# Altium PCB PCB2.PcbDoc
Units mil, origin at the board's own origin, x right, y up, seen from the top; angles counter-clockwise.
Board outline 3530 x 3213.31 mil, 4 copper layers (Top Layer, Layer 1, Layer 2, Bottom Layer), stack 62.192 mil thick; 41 components, 21 nets, 168 pads, 535 vias.
Unrouted connection lines stored in the file: 24.
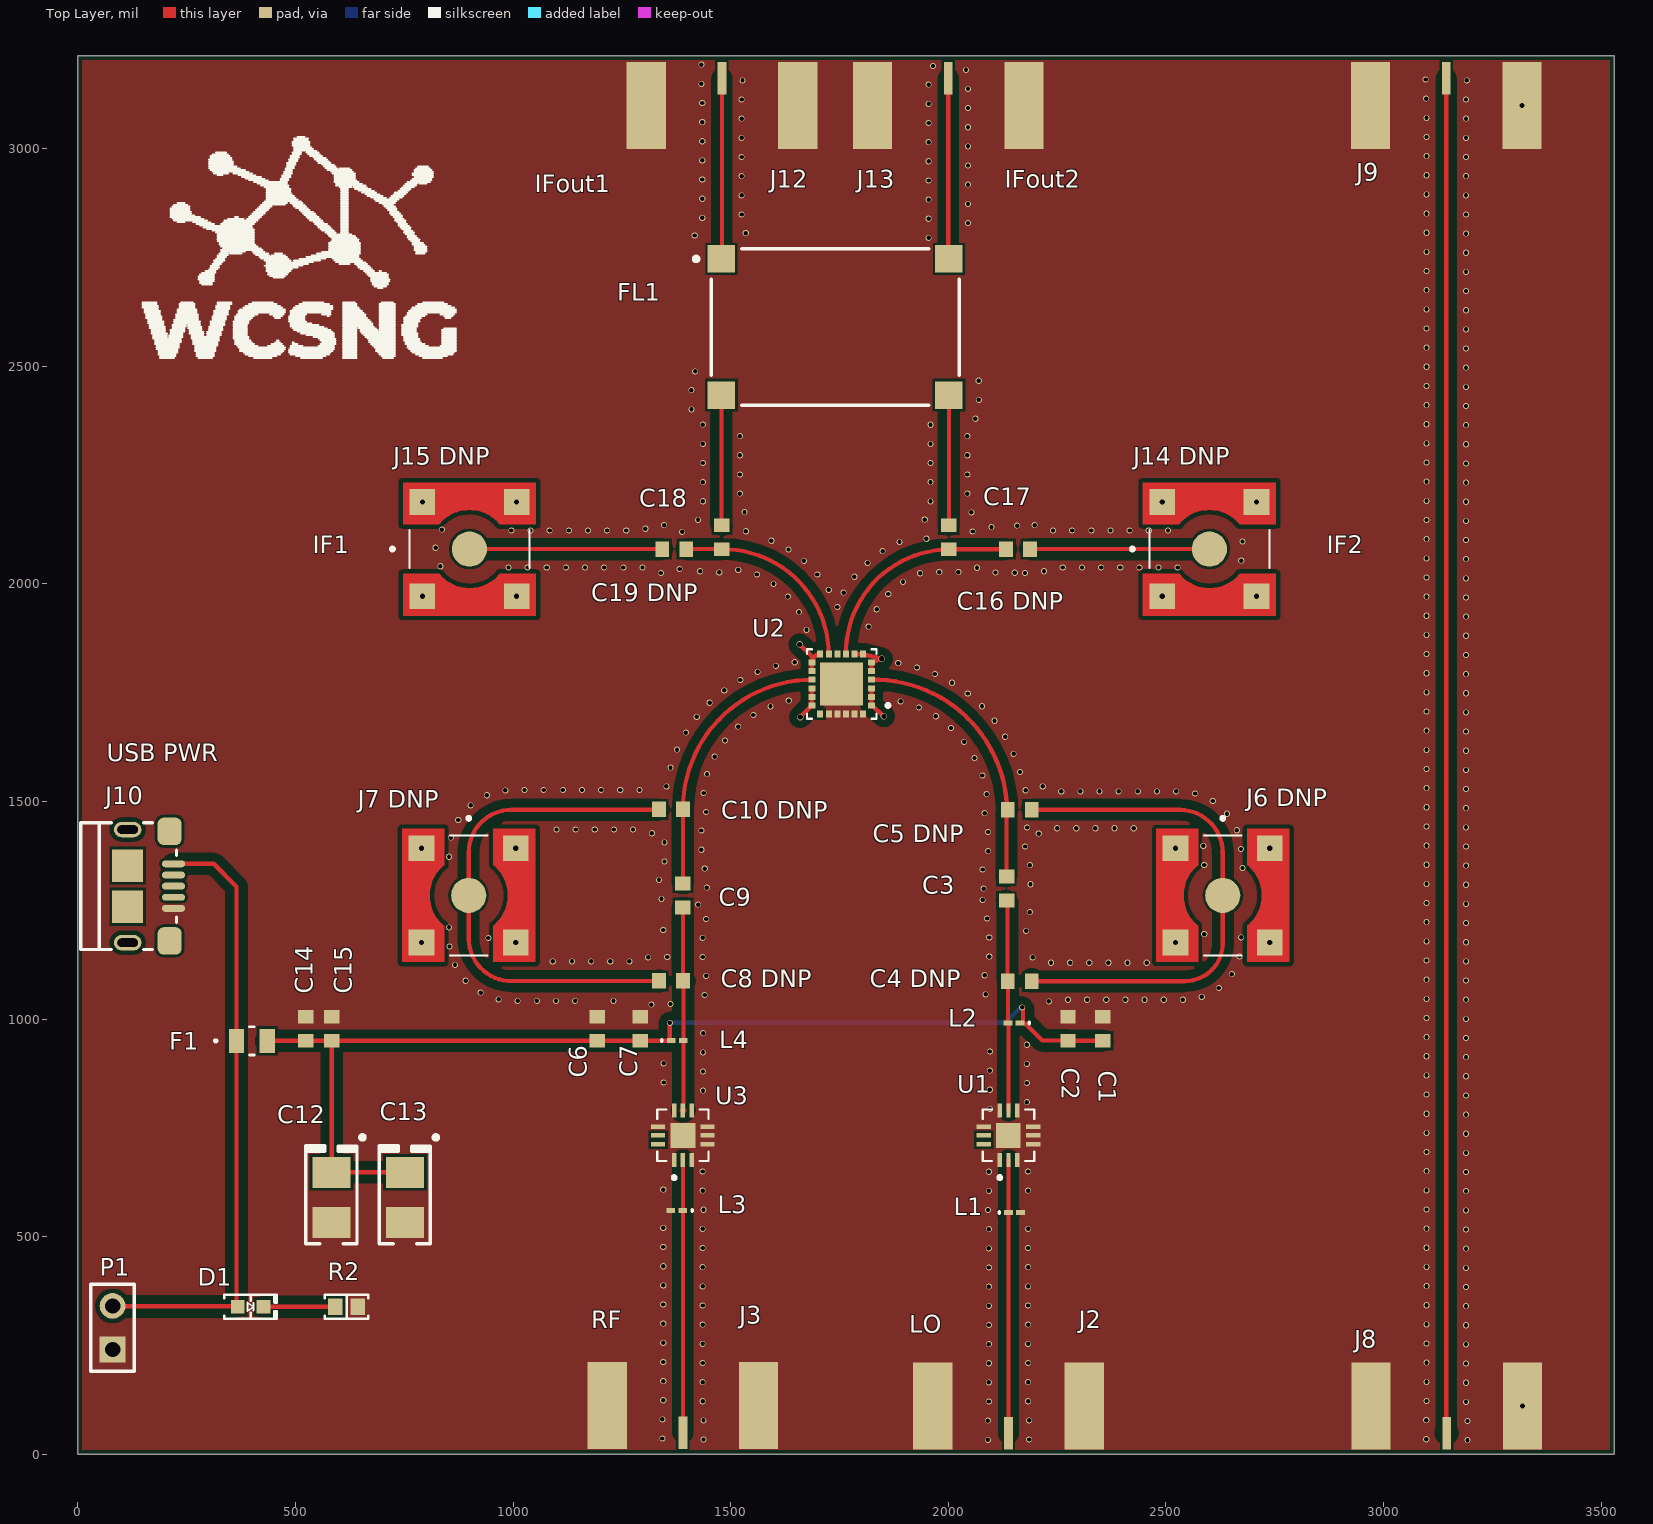
[diagram p0: Top Layer view]
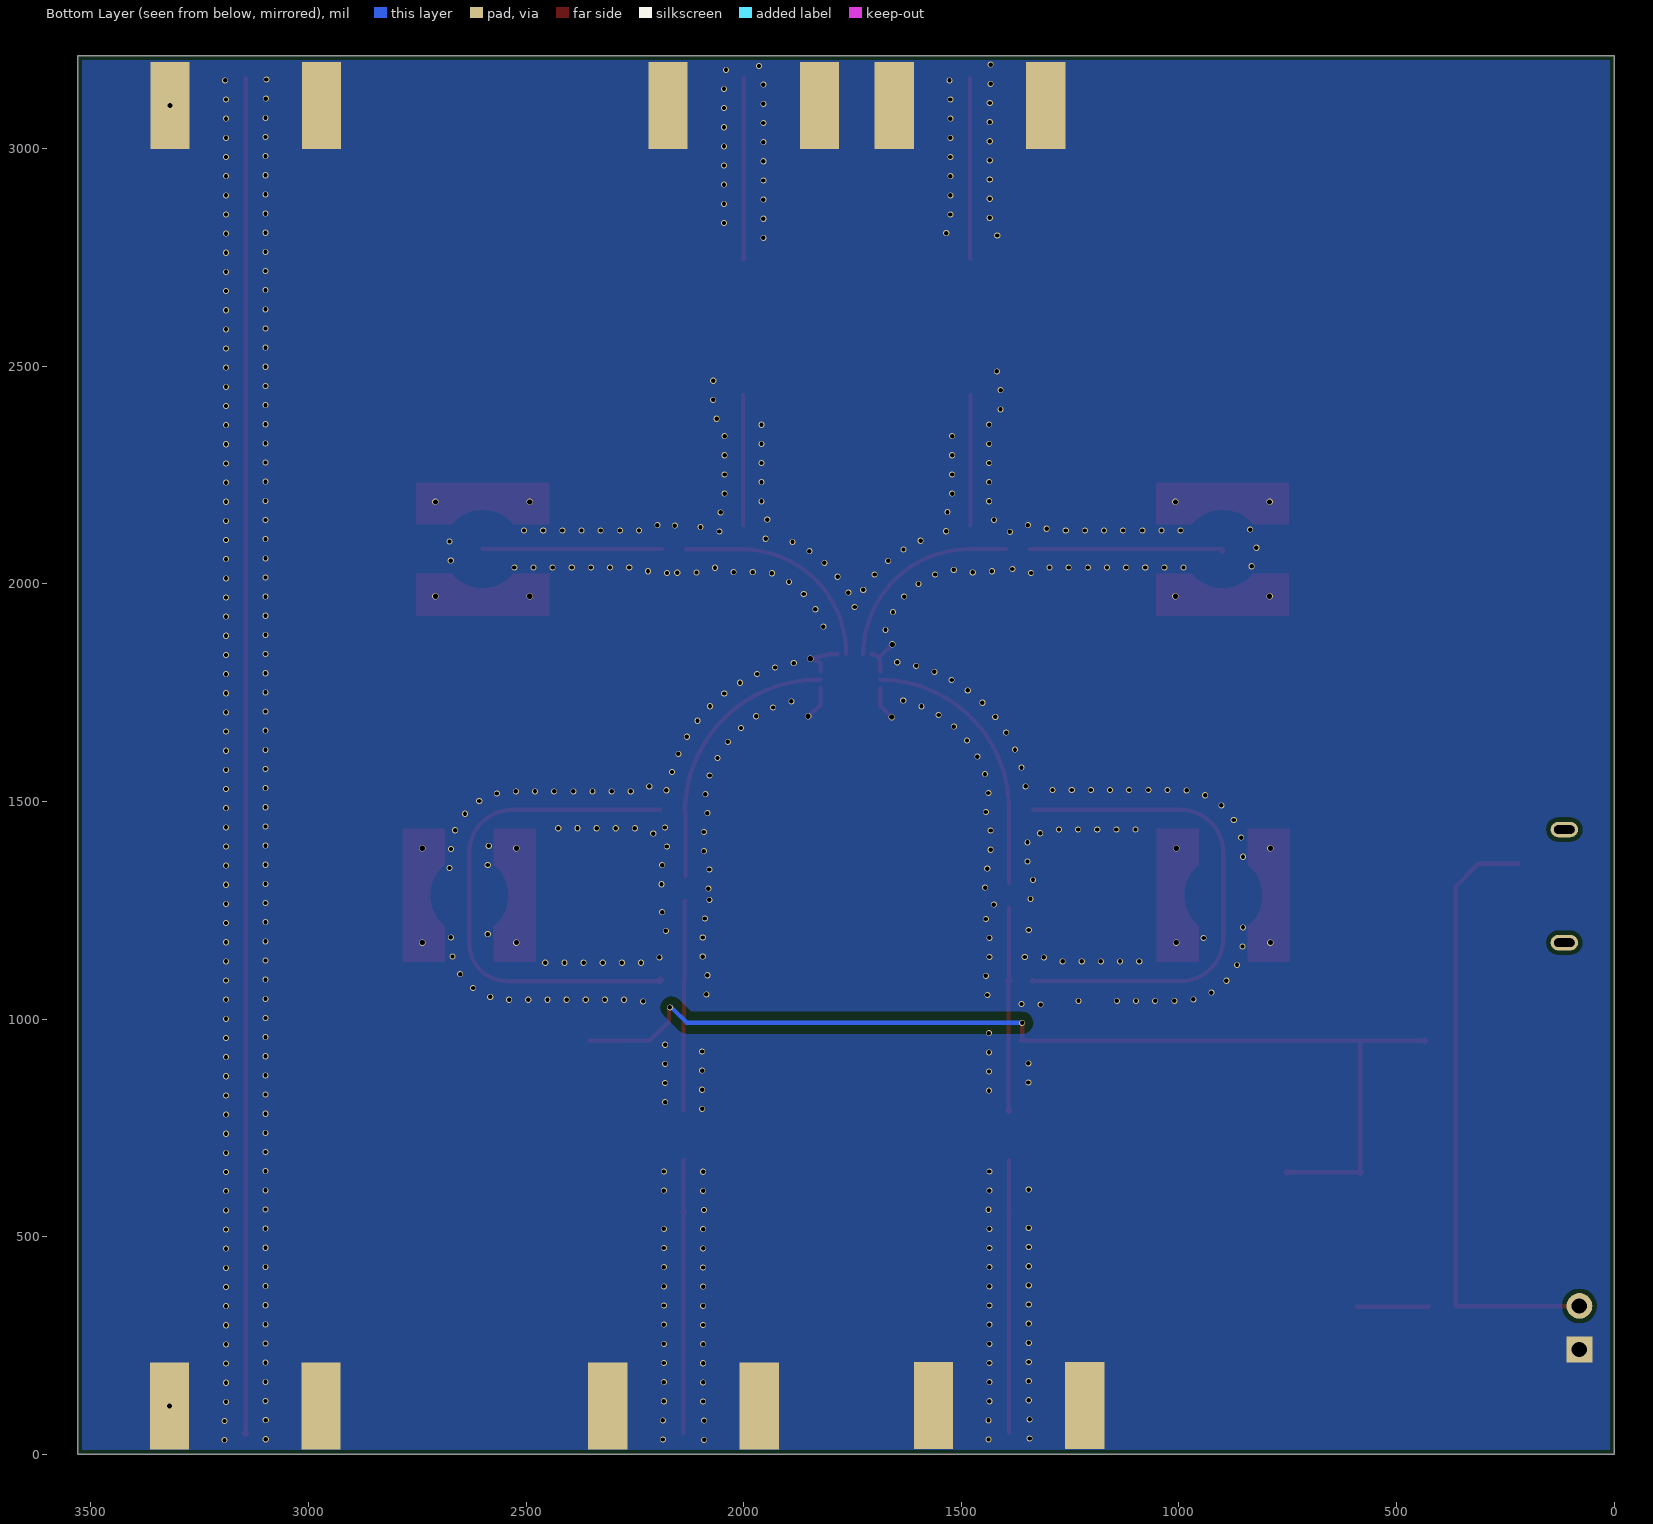
[diagram p1: Bottom Layer view, seen from below]
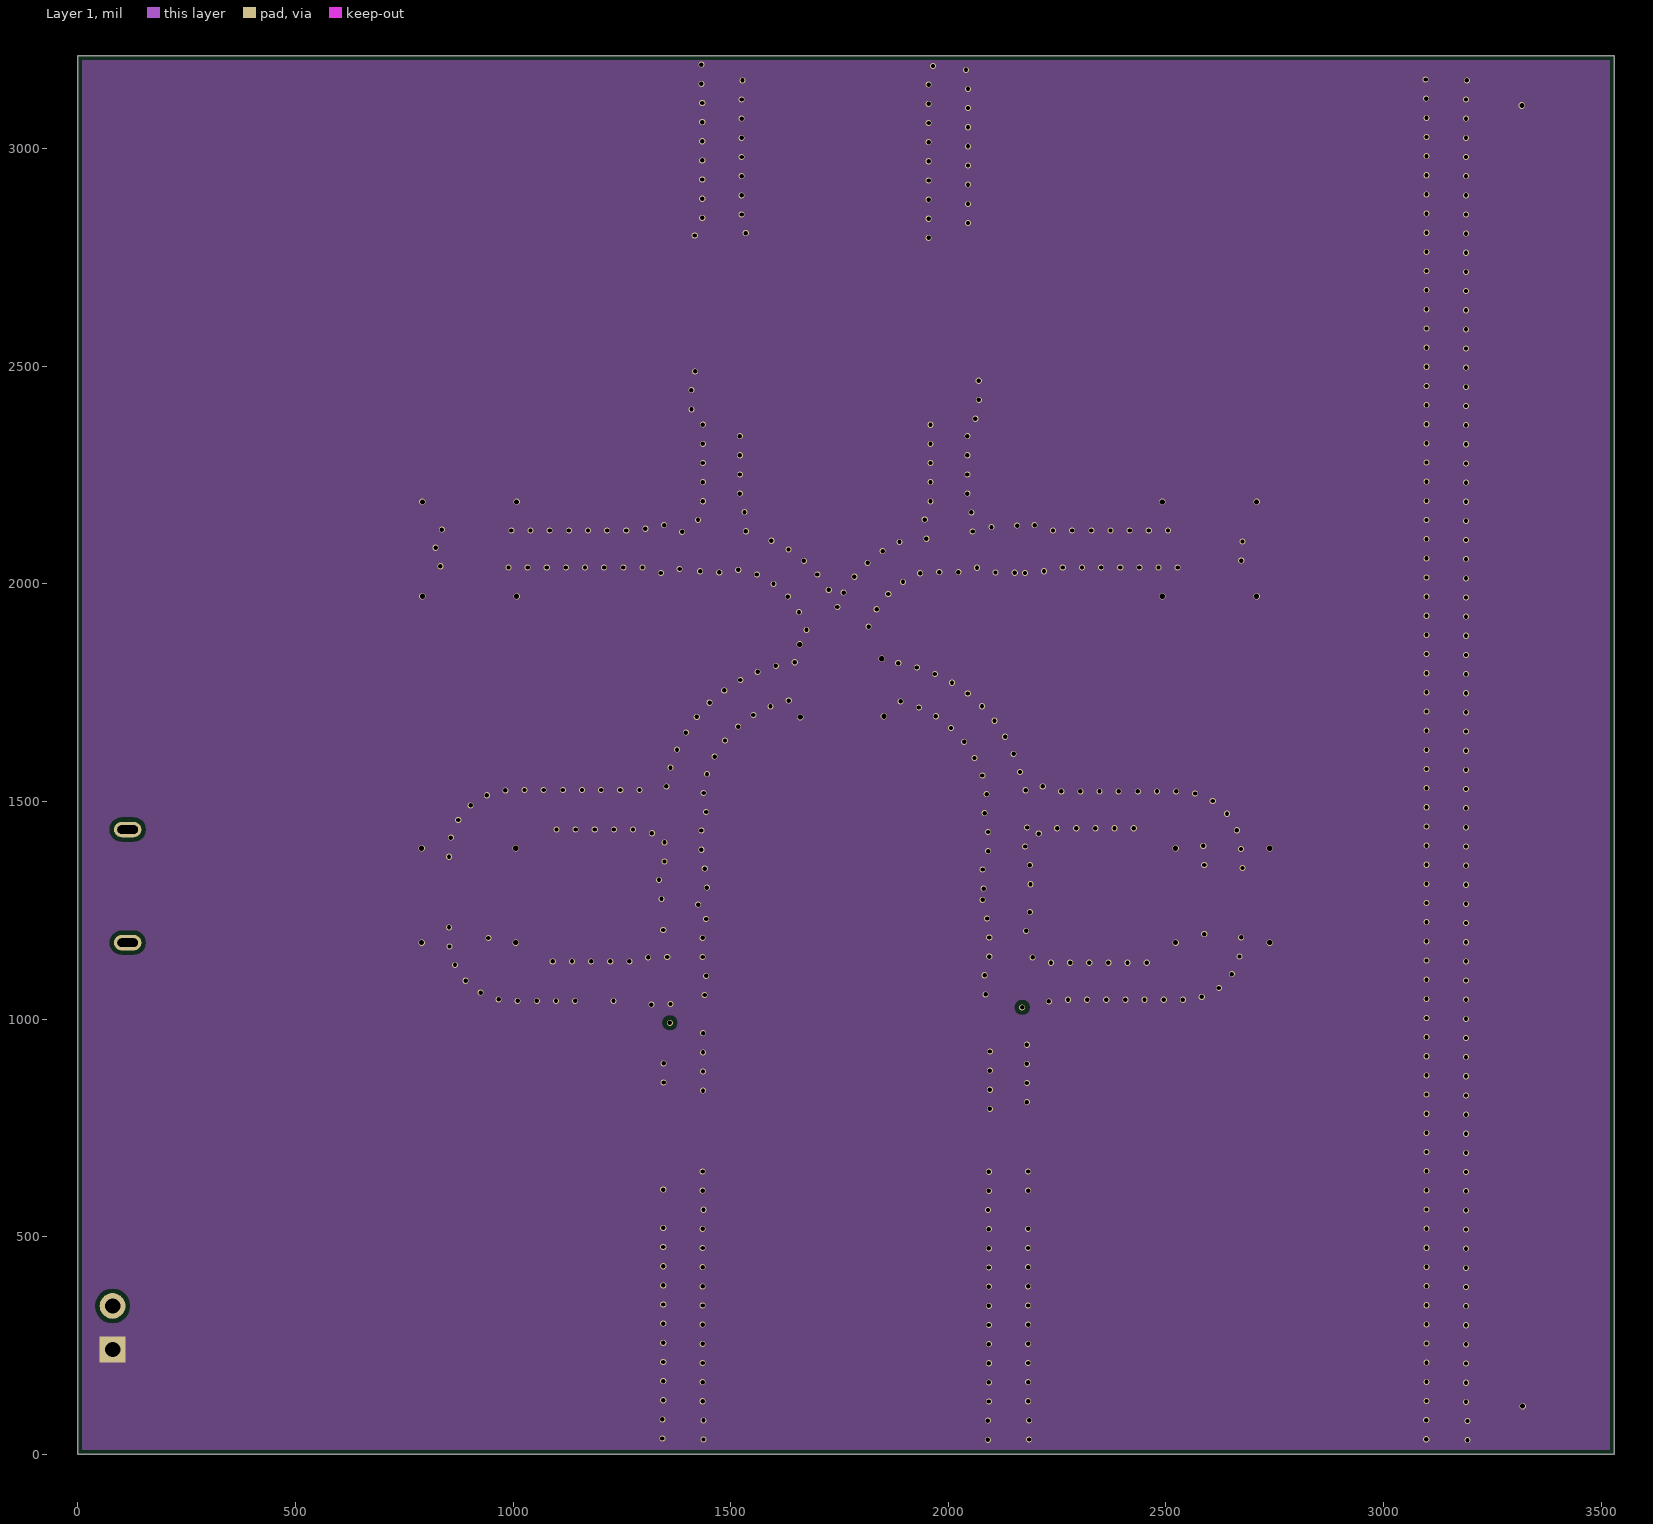
[diagram p2: Layer 1]

## Layer stack, top to bottom
Top Solder: solder mask 0.4, Solder Resist, Dk 3.5
Top Layer: signal copper 1.378
Prepreg-1: prepreg 4, RO4450F, Dk 3.52
Layer 1: signal copper 1.378
FR4 Core: core 48.68, FR4, Dk 4.2
Layer 2: signal copper 1.378
Prepreg-2: prepreg 4, RO4450F, Dk 3.52
Bottom Layer: signal copper 1.378
Bottom Solder: solder mask 0.4, Solder Resist, Dk 3.5

## Board outline
0,3213.31 0,0 3530,0 3530,3213.31

## Design rules (kind name [scope] priority, off if disabled: settings)
BoardOutlineClearance [All] p1: gap=10 ignorepadtopadclearanceinfootprint=FALSE except(0: Arc-SplitContinuation Track-SplitContinuation SMDPad-SplitContinuation THPad-SplitContinuation Via-SplitContinuation Fill-SplitContinuation Poly-SplitContinuation Region-SplitContinuation Text-SplitContinuation)
Clearance [All] p1: gap=10 ignorepadtopadclearanceinfootprint=TRUE except(4: Arc-Arc Arc-Track Track-Track SMDPad-SMDPad; 6: Arc-SMDPad Arc-Via Track-SMDPad Track-Via SMDPad-Via SMDPad-Fill SMDPad-Poly SMDPad-Region; 13: Arc-Hole Track-Hole; 20: Arc-Fill Arc-Poly Arc-Region Track-Fill Track-Poly Track-Region)
MinimumSolderMaskSliver [All] p1: minsoldermaskwidth=1
PolygonConnect [All] p1: connectstyle=Direct reliefconductorwidth=10 reliefentries=4 polygonreliefangle="90 Angle" airgapwidth=10
RoutingVias [All] p1: holewidth=10 width=14 viastyle="Through Hole" minholewidth=10 minwidth=14 maxholewidth=16 maxwidth=20
SilkToSolderMaskClearance [IsPad] p1: minsilkscreentomaskgap=6 clearancetoexposedcopper=TRUE
SolderMaskExpansion [All] p1: expansion=4 istentingtop=FALSE
Width "Schematic Width Constraint_3" [InNet('GND')] p1: maxlimit=10 minlimit=10 preferedwidth=10
Width "Schematic Width Constraint_1" [InNet('NetD1_1')] p2: maxlimit=10 minlimit=10 preferedwidth=10
Width "Schematic Width Constraint" [InNet('NetD1_2')] p3: maxlimit=10 minlimit=10 preferedwidth=10
Width [All] p4: maxlimit=20 minlimit=6 preferedwidth=9.46
28 further rules are at their usual default settings.

## Classes and differential pairs
component class Sheet2: C1 C2 C3 "C4 DNP" "C5 DNP" C6 C7 "C8 DNP" C9 "C10 DNP" C12 C13 C14 C15 "C16 DNP" C18 D1 F1 FL1 J2 J3 "J6 DNP" "J7 DNP" J8 J9 J10 J12 J13 "J14 DNP" L1 L2 L3 L4 P1 R2 U1 U2 U3

## Components (designator, comment, footprint, x,y, rotation, side; value= is the part's Value field where it differs from the comment)
C1 "Cap Semi" 1608[0603] 2354.88,978 r90 top value=10nF
C2 "Cap Semi" 1608[0603] 2275,978 r90 top value=10pF
C3 "Cap Semi" 1608[0603] 2134,1300 r90 top value=100pF
"C4 DNP" "Cap Semi" 1608[0603] 2164,1087 r180 top value=100pF
"C5 DNP" "Cap Semi" 1608[0603] 2164,1481 r180 top value=100pF
C6 "Cap Semi" 1608[0603] 1193.46,978 r90 top value=10nF
C7 "Cap Semi" 1608[0603] 1291.89,978 r90 top value=10pF
"C8 DNP" "Cap Semi" 1608[0603] 1363,1088 r0 top value=100pF
C9 "Cap Semi" 1608[0603] 1390.32,1284.17 r90 top value=100pF
"C10 DNP" "Cap Semi" 1608[0603] 1363,1482 r0 top value=100pF
C12 "10µF" "CAP POL 1411_3528" 583.23,590.52 r270 top
C13 "10µF" "CAP POL 1411_3528" 752,590.52 r270 top
C14 "Cap Semi" 1608[0603] 524,978 r90 top value=1uF
C15 "Cap Semi" 1608[0603] 583.23,978 r90 top value=100nF
"C16 DNP" "Cap Semi" 1608[0603] 2160.31,2080 r0 top value=100pF
C17 "Cap Semi" 1608[0603] 2001,2107 r270 top value=100pF
C18 "Cap Semi" 1608[0603] 1480,2107 r270 top value=100pF
"C19 DNP" "Cap Semi" 1608[0603] 1370.31,2080 r0 top value=100pF
D1 "Blue" "LED 0603_1608 BLUE" 397,339 r0 top
F1 "Part Number: MFU0805FF01000P100" FUS_VISHAY_MFU08 400,950 r0 top value=Value
FL1 "11305-3S" Anaren_11305-3S_MFG 1740,2590 r0 top
J2 "SMA 50 Ohm edge" "SMA-OSHPARK-4L-1.6MM- ALT3" 2138.35,10 r90 top
J3 "SMA 50 Ohm edge" "SMA-OSHPARK-4L-1.6MM- ALT3" 1390.31,11.5 r90 top
"J6 DNP" "CONSMA001-SMD-G" *LINX_CONSMA001-SMD-G_CONSMA001-SMD-G(Primary) 2630.47,1284.17 r0 top
"J7 DNP" "CONSMA001-SMD-G" *LINX_CONSMA001-SMD-G_CONSMA001-SMD-G(Primary) 898.19,1284.17 r0 top
J8 "SMA 50 Ohm edge" "SMA-OSHPARK-4L-1.6MM- ALT3" 3145.45,10 r90 top
J9 "SMA 50 Ohm edge" "SMA-OSHPARK-4L-1.6MM- ALT3" 3144,3200 r270 top
J10 "10118193-0001LF" "FCI USB 10118193-0001LF" 116.65,1305.59 r90 top
J12 "SMA 50 Ohm edge" "SMA-OSHPARK-4L-1.6MM- ALT3" 1480,3200 r270 top
J13 "SMA 50 Ohm edge" "SMA-OSHPARK-4L-1.6MM- ALT3" 2000,3200 r270 top
"J14 DNP" "CONSMA001-SMD-G" *LINX_CONSMA001-SMD-G_CONSMA001-SMD-G(Primary) 2600,2080 r90 top
"J15 DNP" "CONSMA001-SMD-G" *LINX_CONSMA001-SMD-G_CONSMA001-SMD-G(Primary) 900,2080 r90 top
L1 "Inductor" 0603 2152.13,555.83 r0 top value=18nH
L2 "Inductor" 0603 2151,991 r180 top value=39nH
L3 "Inductor" 0603 1376.53,560 r180 top value=18nH
L4 "Inductor" 0603 1377,951 r0 top value=39nH
P1 "Header 2" HDR1X2 80,241 r90 top
R2 "1 kOhms" "RES 0603_1608" 617.59,339 r180 top
U1 "PMA3-83LN+" *QFN51P300X300X89-13N#1 2138.35,732.99 r90 top
U2 "HMC8193LC4" *PQFN50P390X390X100-25N 1755,1770 r180 top
U3 "PMA3-83LN+" *QFN51P300X300X89-13N#2 1390.31,732.99 r90 top

## Footprints (in the part's own frame and the unit in brackets; to place one, negate y for a bottom-side part, rotate by r counter-clockwise, add the part's x,y. Pads: shape width x height; smd on the part's side, far side on the other; paste and mask are expansions set on the pad)
0603 [mm] "Chip Inductor, Body 0.6x0.3mm, IPC High Density"
  rect 0.5x0.3 smd: 1(-0.35,0) 2(0.35,0)
  silkscreen extent -0.9,-0.05 -0.9,0.05, body extent -0.33,-0.18 0.33,0.18, height 0.55
1608[0603] [mm] "Chip Capacitor, Body 1.6x0.8mm, IPC High Density"
  rect 0.8x0.9 smd: 1(-0.7,0) 2(0.7,0)
  body extent -0.87,-0.48 0.87,0.48, height 1.3
*LINX_CONSMA001-SMD-G_CONSMA001-SMD-G(Primary) [mm]
  round 2.05 smd: C(0,0)
  rect 1.5x1.5 smd: G1(-2.75,2.75) G2(-2.75,-2.75) G3(2.75,-2.75) G4(2.75,2.75)
  Top Layer region: 1.44,-3.88 1.44,-1.76 1.54,-1.68 1.618,-1.605 1.705,-1.512 1.787,-1.415 1.864,-1.312 1.934,-1.206 1.999,-1.096 2.057,-0.983 2.109,-0.866 2.154,-0.747 2.193,-0.625 2.225,-0.501 2.249,-0.376 2.267,-0.25 2.278,-0.123 2.281,0.005 2.278,0.133 2.267,0.26 2.249,0.386 2.225,0.511 2.193,0.635 2.154,0.757 2.109,0.876 2.057,0.993 1.999,1.106 1.934,1.216 1.864,1.322 1.787,1.425 1.705,1.522 1.618,1.615 1.54,1.69 1.44,1.76 1.44,3.88 3.88,3.88 3.88,-3.88 1.44,-3.88
  Top Layer region: -1.44,3.88 -1.44,1.76 -1.54,1.68 -1.644,1.579 -1.728,1.486 -1.807,1.389 -1.88,1.288 -1.948,1.183 -2.01,1.075 -2.066,0.963 -2.116,0.849 -2.159,0.732 -2.197,0.612 -2.227,0.491 -2.251,0.368 -2.268,0.244 -2.278,0.12 -2.281,-0.005 -2.278,-0.13 -2.268,-0.254 -2.251,-0.378 -2.227,-0.501 -2.197,-0.622 -2.159,-0.742 -2.116,-0.859 -2.066,-0.973 -2.01,-1.085 -1.948,-1.193 -1.88,-1.298 -1.807,-1.399 -1.728,-1.496 -1.644,-1.589 -1.54,-1.69 -1.44,-1.76 -1.44,-3.88 -3.88,-3.88 -3.88,3.88 -1.44,3.88
  silkscreen extent -1.1,-3.5 1.1,4.6
*PQFN50P390X390X100-25N [mm]
  rect 0.41x0.35 smd: 1(-1.74,1.25) 2(-1.74,0.75) 3(-1.74,0.25) 4(-1.74,-0.25) 5(-1.74,-0.75) 6(-1.74,-1.25) 13(1.74,-1.25) 14(1.74,-0.75) 15(1.74,-0.25) 16(1.74,0.25) 17(1.74,0.75) 18(1.74,1.25)
  rect 0.35x0.41 smd: 7(-1.25,-1.74) 8(-0.75,-1.74) 9(-0.25,-1.74) 10(0.25,-1.74) 11(0.75,-1.74) 12(1.25,-1.74) 19(1.25,1.74) 20(0.75,1.74) 21(0.25,1.74) 22(-0.25,1.74) 23(-0.75,1.74) 24(-1.25,1.74)
  rect 2.5x2.5 smd: 25(0,0)
  silkscreen extent -2.8,-2.03 2.03,2.03
*QFN51P300X300X89-13N#1 [mm]
  rect 0.82x0.26 smd: 1(-1.445,0.51) 2(-1.445,0) 3(-1.445,-0.51) 7(1.445,-0.51) 8(1.445,0) 9(1.445,0.51)
  rect 0.26x0.82 smd: 4(-0.51,-1.445) 5(0,-1.445) 6(0.51,-1.445) 10(0.51,1.445) 11(0,1.445) 12(-0.51,1.445)
  rect 1.45x1.45 smd: 13(0,0.011)
  silkscreen extent -2.56,-1.5 1.5,1.5
*QFN51P300X300X89-13N#2 [mm]
  rect 0.82x0.26 smd: 1(-1.445,0.51) 2(-1.445,0) 3(-1.445,-0.51) 7(1.445,-0.51) 8(1.445,0) 9(1.445,0.51)
  rect 0.26x0.82 smd: 4(-0.51,-1.445) 5(0,-1.445) 6(0.51,-1.445) 10(0.51,1.445) 11(0,1.445) 12(-0.51,1.445)
  rect 1.45x1.45 smd: 13(0,0)
  silkscreen extent -2.56,-1.5 1.5,1.5
Anaren_11305-3S_MFG [mm]
  rect 1.6x1.6 smd paste+0 mask+0: 1(-6.64,3.975) 2(6.64,3.975) 3(6.64,-3.975) 4(-6.64,-3.975)
  silkscreen extent -8.23,-4.57 7.23,4.57, body extent -7.54,-4.87 7.54,4.87, height 0.25
"CAP POL 1411_3528" [mm] "Molded Capacitor, 2-Leads, Body 3.50x2.80mm, IPC Medium Density"
  rect 1.8x2.23 smd: 1(-1.46,0) 2(1.46,0)
  silkscreen extent -3.62,-1.5 2.71,1.92, body extent -1.87,-1.45 1.86,1.45, height 2
"FCI USB 10118193-0001LF" [mm] "USB 2.0 Type B Micro"
  oval 0.4x1.35 smd: 1(1.3,-2.625) 2(0.65,-2.625) 3(0,-2.625) 4(-0.65,-2.625) 5(-1.3,-2.625)
  oval 0.9x1.6 hole 0.5 slot 1.2 at 90 deg: S(-3.3,0.05) S(3.3,0.05)
  rrect50% 1.6x1.4 smd: S(-3.2,-2.4) S(3.2,-2.4)
  rect 1.9x1.8 smd: S(-1.2,0.05) S(1.2,0.05)
  silkscreen extent -3.7,-2.8 3.7,2.8, body extent -3.93,-2.9 3.93,2.76, height 2.78
FUS_VISHAY_MFU08 [mil]
  rect 35.5x55 smd: 1(-35.25,0) 2(35.25,0)
  silkscreen extent -86,-32 5,32, body extent 0,0 10,10, height 10
HDR1X2 [mm] "Connector; Header; 2 Position"
  rect 1.5x1.5 hole 0.9: 1(0,0)
  round 1.5 hole 0.9: 2(2.54,0)
  silkscreen extent -1.27,-1.27 3.81,1.27
"LED 0603_1608 BLUE" [mm] "Chip Diode, 2-Leads, Body 1.60x0.80mm, IPC Medium Density"
  rect 0.8x0.8 smd: 1(-0.75,0) 2(0.75,0)
  silkscreen extent -1.52,-0.7 1.52,0.7, body extent -0.8,-0.4 0.8,0.4, height 0.53
"RES 0603_1608" [mm] "Chip Resistor, 2-Leads, Body 1.60x0.80mm, IPC Medium Density"
  rect 0.85x0.95 smd: 1(-0.65,0) 2(0.65,0)
  silkscreen extent -1.27,-0.7 1.27,0.7, body extent -0.8,-0.4 0.8,0.4, height 0.45
"SMA-OSHPARK-4L-1.6MM- ALT3" [mil] "Short and thin signal pin"
  rect 200x90 smd: GND(101,174) GND(101,-174)
  rect 200x90 smd far side: GND(101,174) GND(101,-174)
  rect 75x20 smd: SIG(38.5,0)

## Part data
C1 C2 C3 "C4 DNP" "C5 DNP" C6 C7 "C8 DNP" C9 "C10 DNP" C14 C15 "C16 DNP" C17 C18 "C19 DNP": "Capacitor (Semiconductor SIM Model)", LatestRevisionDate=29-May-2009, LatestRevisionNote="IPC-7351 Footprint Added.", PackageDescription="Chip Capacitor", PackageReference=C1206, Published=8-Jun-2000, Publisher="Altium Limited"
C12 C13: library part T491T106K016AT, "CAP TANT 10UF 10% 16V 1411", Device Package="1411 (3528 Metric)", ESR (Equivalent Series Resistance)=8Ohm, Lifetime @ Temp.="2000 Hrs @ 125°C", Manufacturer=KEMET, Manufacturer Size Code=T, Operating Temperature="-55°C ~ 125°C", Supplier Part Number 1=399-8400-1-ND, Tolerance=±10%, Voltage - Rated=16V, Capacitance=10µF, ComponentLink1Description=Datasheet, ComponentLink1URL=https://api.kemet.com/component-edge/download/datasheet/T491T106K016AT.pdf, ComponentLink2Description="DigiKey Link", ComponentLink2URL=http://digikey.com/product-detail/en/kemet/T491T106K016AT/399-8400-1-ND/3472123, Features="General Purpose", Height - Seated (Max)="0.047\" (1.20mm)", LastUpdated="1/2/2020 12:10:45 AM", Lifecycle Status=Active, Minimum Order=1, Mounting Type="Surface Mount", Package / Case="1411 (3528 Metric)", Packaging=ReReel, PartId=5, Part Number=T491T106K016AT, Part Status=Active, Price=0.00, Series=T491, Size / Dimension="0.138\" L x 0.110\" W (3.50mm x 2.80mm)", Supplier 1=DigiKey, Type=Molded
D1: library part LTST-C194TBKT, "LED BLUE CLEAR SMD", Current - Test=20mA, Device Package="0603 (1608 Metric)", Lens Color=Colorless, Manufacturer="Lite-On Inc.", Millicandela Rating=104mcd, Supplier Part Number 1=160-1837-1-ND, Voltage - Forward (Vf) (Typ)=3.3V, Color=Blue, ComponentLink1Description=Datasheet, ComponentLink1URL=http://optoelectronics.liteon.com/upload/download/DS22-2010-0025/LTST-C194TBKT.PDF, ComponentLink2Description="DigiKey Link", ComponentLink2URL=http://digikey.com/product-detail/en/lite-on-inc/LTST-C194TBKT/160-1837-1-ND/2356236, Configuration=Standard, Height (Max)=0.45mm, LastUpdated="1/12/2020 12:13:59 AM", Lens Size="1.15mm x 0.80mm", Lens Style="Rectangle with Flat Top", Lens Transparency=Clear, Lifecycle Status=Active, Minimum Order=1, Mounting Type="Surface Mount", Package / Case="0603 (1608 Metric)", Packaging=TapeAndReel, PartId=828, Part Number=LTST-C194TBKT, Part Status=Active, Price=0.06, Series=-, Size / Dimension="1.60mm L x 0.80mm W", Supplier 1=DigiKey, Viewing Angle=130°, Wavelength - Dominant=468nm, Wavelength - Peak=468nm
F1: library part MFU0805FF01000P1, "No Description Available", Manufacturer_Part_Number=MFU0805FF01000P100, Built_By=EMA_UL_Team, Copyright="Copyright (C) 2018 Accelerated Designs. All rights reserved", RefDes=RefDes, Type=DEV, Vendor=VISHAY
J2 J3 J8 J9 J12 J13: library part SMA-OSHPARK-4L-1.6MM-ALT3, Package=SMA-OSHPARK-4L-1.6MM, Supplier Part Number 1=J658-ND, DeviceName=-OSHPARK-4L-1.6MM, DeviceSetName=SMA, GateName_1=G1, LibraryName=dword1511-connectors, Supplier 1=Digi-Key, SymbolName_1=COAX
"J6 DNP" "J7 DNP" "J14 DNP" "J15 DNP": "SMA Connector Receptacle, Female Socket 50Ohm Surface Mount Solder", Package=None, Availability=Unavailable, MF="Linx Technologies", MP=CONSMA001-SMD-G, Price=None, SnapEDA_Link=https://www.snapeda.com/parts/CONSMA001-SMD-G/Linx%20Technologies%20Inc./view-part/353460/?ref=snap
J10: "CONN RCPT USB2.0 MICRO B SMD R/A", Current Rating (Amps)="1.8A per Contact", Manufacturer="Amphenol ICC (FCI)", Operating Temperature="-30°C ~ 80°C", Supplier Part Number 1=609-4616-2-ND, Voltage - Rated=100VAC, ComponentLink1Description=Datasheet, ComponentLink1URL=https://cdn.amphenol-icc.com/media/wysiwyg/files/documentation/datasheet/inputoutput/io_usb_micro.pdf, ComponentLink2Description="DigiKey Link", ComponentLink2URL=//digikey.com/product-detail/en/amphenol-icc-fci/10118193-0001LF/609-4616-2-ND/2785388, Connector Type="USB - micro B", Features="Solder Retention", Gender=Receptacle, LastUpdated="12/9/2019 8:51:28 PM", Lifecycle Status=0, Mating Cycles=10000, Minimum Order=1, Mounting Feature=Horizontal, Mounting Type="Surface Mount, Right Angle; Through Hole", Number of Contacts=5, Number of Ports=1, Packaging=TapeAndReel, Part Number=10118193-0001LF, Part Status=Active, Price=0.21, Series=-, Shielding=Shielded, Specifications="USB 2.0", Supplier 1=DigiKey, Termination=Solder
P1: "Header, 2-Pin", LatestRevisionDate=17-Jul-2002, LatestRevisionNote="Re-released for DXP Platform.", Publisher="Altium Limited"
R2: library part CPF0603B1K0E, "RES SMD 1K OHM 0.1% 1/16W 0603", Device Package="0603 (1608 Metric)", Manufacturer="TE Connectivity Passive Product", Operating Temperature="-55°C ~ 155°C", Power (Watts)="0.063W, 1/16W", Supplier Device Package=0603, Supplier Part Number 1=A119887CT-ND, Temperature Coefficient=±25ppm/°C, Tolerance=±0.1%, ComponentLink1Description=Datasheet, ComponentLink1URL=https://www.te.com/commerce/DocumentDelivery/DDEController?Action=srchrtrv&DocNm=1773200&DocType=DS&DocLang=English, ComponentLink2Description="DigiKey Link", ComponentLink2URL=http://digikey.com/product-detail/en/te-connectivity-passive-product/CPF0603B1K0E/A119887CT-ND/4966485, Composition="Thin Film", Height - Seated (Max)="0.022\" (0.55mm)", LastUpdated="1/12/2020 12:07:17 AM", Lifecycle Status=Active, Minimum Order=1, Number of Terminations=2, Package / Case="0603 (1608 Metric)", Packaging=TapeAndReel, PartId=4877, Part Number=CPF0603B1K0E, Part Status=Active, Price=0.09, Resistance="1 kOhms", Series="CPF, Neohm", Size / Dimension="0.061\" L x 0.031\" W (1.55mm x 0.80mm)", Supplier 1=DigiKey
U1 U3: "MMIC Amplifier, Low Noise, Wideband, High IP3, 0.05 to 8.0GHz, 50ohm, SM", Package=None, Availability=Unavailable, MF=Mini-Circuits, MP=PMA3-83LN+, Price=None, SnapEDA_Link=https://www.snapeda.com/parts/PMA3-83LN%2B/Mini-Circuits/view-part/939810/?ref=snap
U2: "MIXERS", Package="LCC-24 Analog Devices", Availability=Unavailable, MF="Analog Devices", MP=HMC8193LC4, Price=None, SnapEDA_Link=https://www.snapeda.com/parts/HMC8193LC4/Analog%20Devices%20Inc./view-part/?ref=snap
L1 L2 L3 L4: Code_IEC=1005, Code_JEITA=0402, LatestRevisionDate=29-May-2009, LatestRevisionNote="IPC-7351 Footprint Added.", PackageDescription="Chip Inductor", PackageReference=0402-A, Published=8-Jun-2000, Publisher="Altium Limited"

## Via types
v1: diameter 14, hole 10, Top Layer to Bottom Layer, 513 vias
v2: diameter 15, hole 12, Top Layer to Bottom Layer, 22 vias

## Nets (pads, with @x,y where several pads share a name; then routed paths per layer and width w, separated by ;. In a path a pad name is that pad's centre, name@x,y a point inside that pad or via, vN(x,y) a via of type N, cw(c..) or ccw(c..) an arc to the next point about the centre after c; other vN are vias at no path point)
GND: "J6 DNP.G1" "J6 DNP.G2" "J6 DNP.G3" "J6 DNP.G4" "J7 DNP.G1" "J7 DNP.G2" "J7 DNP.G3" "J7 DNP.G4" "J14 DNP.G1" "J14 DNP.G2" "J14 DNP.G3" "J14 DNP.G4" "J15 DNP.G1" "J15 DNP.G2" "J15 DNP.G3" "J15 DNP.G4" C1.2 C2.2 C6.2 C7.2 C12.2 C13.2 C14.2 C15.2 J2.GND J3.GND J8.GND J9.GND J10.5 J12.GND J13.GND L1.2 L3.2 P1.1 R2.1 U1.1 U1.3 U1.4 U1.5 U1.6 U1.7 U1.9 U1.10 U1.13 U2.1 U2.2 U2.3 U2.5 U2.6 U2.7 U2.8 U2.12 U2.13 U2.14 U2.16 U2.17 U2.18 U2.20 U2.21 U2.22 U2.23 U2.24 U2.25 U3.1 U3.3 U3.4 U3.5 U3.6 U3.7 U3.9 U3.10 U3.13 | length 357.9
  Top Layer w10: v2(1658.72,1860.79) 1686.66,1832.85 1692.14,1832.85 ; v2(1659.68,1694) U2.18 U2.17 U2.16 ; U2.14 U2.13 cw(c1705.79,1819.21) 1692.14,1832.85 ; U2.12 ccw(c1705.79,1819.21) 1692.14,1832.85 ; U2.8 U2.7 v2(1847,1828) U2.6 U2.5 ; U2.3 U2.2 U2.1 v2(1852,1696)
  other v1: 3192.77,32.84 1437.63,34.13 2091.03,33.45 2185.67,34.13 3098.13,34.72 1343,36.41 3192.77,76.84 1437.63,78.13 2091.03,77.45 2185.67,78.13 3098.13,78.72 1343,80.41 3189.25,120.7 1435.57,122.09 2093.1,121.41 2183.6,122.08 3098.75,122.72 1345.06,124.36 3189.25,164.7 1435.57,166.09 2093.1,165.41 2183.6,166.08 3098.75,166.72 1345.06,168.36 3189.25,208.7 1435.57,210.09 2093.1,209.41 2183.6,210.08 3098.75,210.72 1345.06,212.36 3189.25,252.7 1435.57,254.09 2093.1,253.41 2183.6,254.08 3098.75,254.72 1345.06,256.36 3189.25,296.7 1435.57,298.09 2093.1,297.41 2183.6,298.08 3098.75,298.72 1345.06,300.36 3189.25,340.7 1435.57,342.09 2093.1,341.41 2183.6,342.08 3098.75,342.72 1345.06,344.36 3189.25,384.7 1435.57,386.09 2093.1,385.41 2183.6,386.08 3098.75,386.72 1345.06,388.36 3189.25,428.7 1435.57,430.09 2093.1,429.41 2183.6,430.08 3098.75,430.72 1345.06,432.36 3189.25,472.7 1435.57,474.09 2093.1,473.41 2183.6,474.08 3098.75,474.72 1345.06,476.36 3189.25,516.7 1435.57,518.09 2093.1,517.41 2183.6,518.08 3098.75,518.72 1345.06,520.36 2091.18,561.36 3189.25,560.7 1437.48,562.04 3098.75,562.72 2093.1,605.32 3189.25,604.7 1435.57,606 2183.6,606 3098.75,606.72 1345.06,608.28 2093.1,649.32 3189.25,648.7 1435.57,650 2183.6,650 3098.75,650.72 3189.25,692.7 3098.75,694.72 3189.25,736.7 3098.75,738.72 3189.25,780.7 3098.75,782.72 2095.52,793.77 2180.4,809.16 3189.25,824.7 3098.75,826.72 1436.52,835.76 2095.52,837.77 2180.4,853.16 1346.02,854.29 3189.25,868.7 3098.75,870.72 1436.52,879.76 2095.52,881.77 2180.4,897.16 1346.02,898.29 3189.25,912.7 3098.75,914.72 1436.52,923.76 2095.52,925.77 2180.4,941.16 3189.25,956.7 3098.75,958.72 1436.64,967.76 3189.25,1000.7 3098.75,1002.72 1317.81,1033.21 1361.79,1034.62 2231.08,1040.89 1010.72,1042.12 1054.72,1042.12 1098.72,1042.12 1142.72,1042.12 1230.72,1042.12 966.84,1045.32 2274.93,1044.56 2318.93,1044.56 2362.93,1044.56 2406.93,1044.56 2450.93,1044.56 2494.93,1044.56 2538.93,1044.56 3189.25,1044.7 3098.75,1046.72 2582.41,1051.27 1440.28,1055.61 2085.78,1056.89 925.69,1060.9 2621.53,1071.41 891.18,1088.21 3189.25,1088.7 3098.75,1090.72 1443.63,1099.48 2083.37,1100.83 2651.61,1103.52 866.57,1124.68 2235.85,1129.44 2279.85,1129.44 2323.85,1129.44 2367.85,1129.44 2411.85,1129.44 2455.85,1129.44 1091.34,1132.62 1135.34,1132.62 1179.34,1132.62 1223.34,1132.62 1267.34,1132.62 3189.25,1132.7 3098.75,1134.72 1310.37,1141.81 2193.69,1142.04 1354.36,1142.62 1435.69,1142.76 2094,1143.52 2669.11,1143.89 854.13,1166.88 3189.25,1176.7 3098.75,1178.72 943.47,1186.38 1435.69,1186.76 2094,1187.52 2672.91,1187.73 2588.03,1195.4 2178.88,1202.68 1345.19,1204.92 852.94,1210.87 3189.25,1220.7 3098.75,1222.72 1443.6,1230.04 2089.16,1231.26 2187.28,1245.87 1425.21,1263.05 3189.25,1264.7 3098.75,1266.72 2078.96,1274.06 1341.1,1276.26 2081.18,1299.87 1445.35,1302.17 3189.25,1308.7 2188.79,1309.93 3098.75,1310.72 1335.28,1319.87 2079.03,1343.82 1440.45,1345.9 2675.96,1347.18 3189.25,1352.7 2187.37,1353.91 2588.03,1354.28 3098.75,1354.72 1347.88,1362.03 852.94,1373.07 2091.56,1386 1432.75,1389.22 2672.37,1391.03 2176.44,1396.53 3189.25,1396.7 2585.68,1398.22 3098.75,1398.72 1347.88,1406.03 857.24,1416.86 2207.85,1426.04 1318.93,1427.09 2091.56,1430 1432.75,1433.22 2663.05,1434.03 1099.79,1435.77 1143.79,1435.77 1187.79,1435.77 1231.79,1435.77 1275.79,1435.77 2250.03,1438.56 2294.03,1438.56 2338.03,1438.56 2382.03,1438.56 2426.03,1438.56 2181.17,1440.27 3189.25,1440.7 3098.75,1442.72 874.17,1457.47 2640.44,1471.78 2083.37,1473.23 1443.63,1475.85 3189.25,1484.7 3098.75,1486.72 902.6,1491.05 2607.67,1501.14 939.87,1514.44 2088.2,1516.96 2567.19,1518.39 1437.79,1519.46 2259.48,1523.44 2303.48,1523.44 2347.48,1523.44 2391.48,1523.44 2435.48,1523.44 2479.48,1523.44 2523.48,1523.44 982.47,1525.45 1026.46,1526.27 1070.46,1526.27 1114.46,1526.27 1158.46,1526.27 1202.46,1526.27 1246.46,1526.27 1290.46,1526.27 2177.62,1525.84 3189.25,1528.7 3098.75,1530.72 1352.35,1534.76 2216.97,1534.76 2078.41,1559.86 1445.66,1562.75 2164.7,1567.9 3189.25,1572.7 3098.75,1574.72 1361.93,1577.7 2060.32,1599.97 1463.19,1603.11 2150.17,1609.43 3189.25,1616.7 1376.89,1619.08 3098.75,1618.72 2036.36,1636.87 1487.02,1640.1 2130.59,1648.83 1396.98,1658.22 3189.25,1660.7 3098.75,1662.72 2006.13,1668.84 1517.29,1672.03 2106.26,1685.49 1422.11,1694.34 1971.36,1695.81 1552.2,1698.82 3189.25,1704.7 3098.75,1706.72 1932.32,1716.1 1591.53,1718.53 2077.55,1718.84 1451.72,1726.89 1890.61,1730.12 1633.49,1731.77 2044.73,1748.14 3189.25,1748.7 3098.75,1750.72 1485.39,1755.21 2008.37,1772.92 1522.4,1779.01 1969.2,1792.97 3189.25,1792.7 3098.75,1794.72 1562.13,1797.92 1927.85,1808 1603.94,1811.63 1884.95,1817.76 1647.15,1819.91 3189.25,1836.7 3098.75,1838.72 3189.25,1880.7 3098.75,1882.72 1674.34,1894.44 1816.98,1901.64 3189.25,1924.7 3098.75,1926.72 1657.05,1934.9 1835.28,1941.65 1745.19,1946.98 3189.25,1968.7 1631.38,1970.63 3098.75,1970.72 1862.05,1976.58 1759.71,1979.82 1725.33,1986.24 1598.54,1999.93 1895.93,2004.65 3189.25,2012.7 3098.75,2014.72 1784.3,2016.3 1560.12,2021.37 1699.23,2021.66 1339.64,2024.96 1935.22,2024.45 2176.08,2024.96 1473.87,2026.37 2108.61,2026.07 2152.61,2025.5 1979.15,2026.92 2023.15,2026.96 1429.95,2029 2219.89,2028.97 1517.48,2032.22 1382.66,2034.18 2065.99,2037 989.48,2037.56 1033.48,2037.56 1077.48,2037.56 1121.48,2037.56 1165.48,2037.56 1209.48,2037.56 1253.48,2037.56 1297.48,2037.56 2263.05,2037.56 2307.05,2037.56 2351.05,2037.56 2395.05,2037.56 2439.05,2037.56 2483.05,2037.56 2527.05,2037.56 833.16,2040.37 1814.61,2048.2 1668.16,2052.82 2673.05,2053.38 3189.25,2056.7 3098.75,2058.72 1849.29,2075.28 1632.82,2079.03 822.3,2083.01 1887.88,2096.41 2675.81,2097.29 1593.64,2099.06 3189.25,2100.7 3098.75,2102.72 1949.49,2103.72 1388.4,2119.54 1535.04,2120.86 2056.04,2120.46 996.22,2122.44 1040.22,2122.44 1084.22,2122.44 1128.22,2122.44 1172.22,2122.44 1216.22,2122.44 1260.22,2122.44 2240.61,2122.44 2284.61,2122.44 2328.61,2122.44 2372.61,2122.44 2416.61,2122.44 2460.61,2122.44 2504.61,2122.44 836.39,2124.69 1304.01,2126.71 2099.12,2130.36 2158.16,2133.76 1347.22,2135.04 2198.45,2135.04 3189.25,2144.7 1424.96,2147.19 3098.75,2146.72 1945.96,2147.58 2052.95,2164.35 1531.79,2164.74 3189.25,2188.7 1436.14,2189.74 1958.98,2189.61 3098.75,2190.72 1521.02,2207.4 2043.86,2207.4 3189.25,2232.7 1436.14,2233.74 1958.98,2233.61 3098.75,2234.72 1521.02,2251.4 2043.86,2251.4 3189.25,2276.7 1436.14,2277.74 1958.98,2277.61 3098.75,2278.72 1521.02,2295.4 2043.86,2295.4 3189.25,2320.7 1436.14,2321.74 1958.98,2321.61 3098.75,2322.72 1521.02,2339.4 2043.86,2339.4 3189.25,2364.7 1436.14,2365.74 1958.98,2365.61 3098.75,2366.72 2062.2,2379.39 1409.89,2401.05 3189.25,2408.7 3098.75,2410.72 2070.23,2422.65 1409.77,2445.05 3189.25,2452.7 3098.75,2454.72 2070.01,2466.65 1418.27,2488.22 3189.25,2496.7 3098.75,2498.72 3189.25,2540.7 3098.75,2542.72 3189.25,2584.7 3098.75,2586.72 3189.25,2628.7 3098.75,2630.72 3189.25,2672.7 3098.75,2674.72 3189.25,2716.7 3098.75,2718.72 3189.25,2760.7 3098.75,2762.72 1954.75,2794.87 1417.61,2800.35 3189.25,2804.7 1534.71,2805.73 3098.75,2806.72 2045.25,2829.12 1954.75,2838.87 1434.75,2840.88 1525.25,2848.7 3189.25,2848.7 3098.75,2850.72 2045.25,2873.12 1954.75,2882.87 1434.75,2884.88 1525.25,2892.7 3189.25,2892.7 3098.75,2894.72 2045.25,2917.12 1954.75,2926.87 1434.75,2928.88 1525.25,2936.7 3189.25,2936.7 3098.75,2938.72 2045.25,2961.12 1954.75,2970.87 1434.75,2972.88 1525.25,2980.7 3189.25,2980.7 3098.75,2982.72 2045.25,3005.12 1954.75,3014.87 1434.75,3016.88 1525.25,3024.7 3189.25,3024.7 3098.75,3026.72 2045.25,3049.12 1954.75,3058.87 1434.75,3060.88 1525.25,3068.7 3189.25,3068.7 3098.75,3070.72 2045.25,3093.12 1954.75,3102.87 1434.75,3104.88 1525.37,3112.7 3189.37,3112.7 3097.9,3114.71 2045.25,3137.12 1954.75,3146.87 1432.68,3148.83 1527.32,3156.65 3191.32,3156.65 3096.68,3158.69 2040.85,3180.9 1964.96,3189.67 1432.68,3192.83
  other v2: 3319.45,111 789.92,1175.91 1006.46,1175.91 2522.2,1175.91 2738.74,1175.91 789.92,1392.44 1006.46,1392.44 2522.2,1392.44 2738.74,1392.44 791.73,1971.73 1008.27,1971.73 2491.73,1971.73 2708.27,1971.73 791.73,2188.27 1008.27,2188.27 2491.73,2188.27 2708.27,2188.27 3318,3099
NetC3_1: "C4 DNP.2" C3.1 L2.2 U1.8 | length 484.4
  Top Layer w9.46: C3.1 2136.44,1270 2136.44,1087 2137.22,1086.22 L2.2 2137.96,990.26 2137.96,790.27 U1.8
NetC3_2: "C5 DNP.2" C3.2 U2.4 | length 635.8
  Top Layer w9.46: C3.2@2133.44,1328.12 C3.2 2134,1478.56 2136.44,1481
  Top Layer w10: U2.4 cw(c1829.33,1473.95) 2135.22,1479.78
"NetC4 DNP_1": "C4 DNP.1" "C5 DNP.1" "J6 DNP.C" | length 1194
  Top Layer w9.46: 2191.56,1087 2542.44,1087 2542.76,1087.33 ccw(c2543.52,1174.28) 2630.46,1172.56 ; 2191.56,1481 2532.07,1481 2532.51,1480.56 cw(c2532.51,1382.6) 2630.47,1382.6 2630.47,1284.17 2630.47,1174.28
  Top Layer w10: 2629.54,1383.53 2630.47,1382.6
  Top Layer w15.56: 2191.56,1090 2193.24,1088.32
"NetC8 DNP_1": "C8 DNP.1" "C10 DNP.1" "J7 DNP.C" | length 1182.2
  Top Layer w9.46: 898.2,1184.01 ccw(c996.58,1185.75) 998.32,1087.37 1334.81,1087.37 ; 898.19,1185.75 898.19,1284.17 898.19,1382.6 cw(c996.61,1382.6) 996.61,1481.02 1335.44,1481.02
  Top Layer w12.56: 1334.81,1087.37 1335.44,1088
"NetC8 DNP_2": "C8 DNP.2" C9.1 L4.2 U3.8 | length 465.6
  Top Layer w9.46: 1390.44,1088.12 C9.1@1390.44,1256.49 ; U3.8@1391.27,790.83 L4.2@1391.27,949.05 ; L4.2@1391.39,950.83 1391.39,1087.17
  Top Layer w15.56: U3.8 U3.8@1391.27,790.83 ; 1390.44,1088.12 1390.56,1088 1391.39,1087.17
NetC9_2: "C10 DNP.2" C9.2 U2.15 | length 636.9
  Top Layer w9.46: C9.2 1390.31,1481.76 1390.56,1482 ; 1390.44,1481.88 cw(c1687.45,1482.83) U2.15
"NetC16 DNP_1": "C16 DNP.1" C17.2 U2.9 | length 506.4
  Top Layer w9.46: U2.9 cw(c2003.17,1840.67) C17.2@2001,2079 ; C17.2 2132.2,2079.44 2132.76,2080
"NetC16 DNP_2": "C16 DNP.2" "J14 DNP.C" | length 412.1
  Top Layer w9.46: 2187.87,2080 2600,2080
NetC17_1: C17.1 FL1.3 | length 299.1
  Top Layer w9.46: C17.1 2001.42,2134.98 FL1.3
NetC18_1: C18.1 FL1.4 | length 299.5
  Top Layer w9.46: FL1.4 1478.58,2135.98 C18.1
NetC18_2: "C19 DNP.2" C18.2 U2.11 | length 464.8
  Top Layer w9.46: 1397.87,2080 1479.44,2080 C18.2 ; C18.2@1479.72,2079.72 cw(c1481.99,1836.24) U2.11
"NetC19 DNP_1": "C19 DNP.1" "J15 DNP.C" | length 446.3
  Top Layer w9.46: 900,2080 1342.76,2080
  Top Layer w12.56: 900,2075 902.5,2077.5
NetD1_1: D1.1 F1.1 J10.1 P1.2 | length 1414.5
  Top Layer w10: P1.2@80,340 363.03,340 364.75,341.72 F1.1 364.75,1304.25 312.23,1356.77 J10.1
NetD1_2: D1.2 R2.2 | length 165.5
  Top Layer w10: D1.2 R2.2
NetFL1_1: FL1.1 J12.SIG | length 415.6
  Top Layer w9.46: FL1.1 1480,2747.91 J12.SIG
NetFL1_2: FL1.2 J13.SIG | length 415.6
  Top Layer w9.46: FL1.2@2000,2747.91 J13.SIG
  Top Layer w12.56: FL1.2@2000,2747.91 FL1.2
NetJ2_SIG: J2.SIG L1.1 U1.2 | length 627.6
  Top Layer w9.46: J2.SIG L1.1 U1.2
NetJ3_SIG: J3.SIG L3.1 U3.2 | length 626.1
  Top Layer w9.46: J3.SIG L3.1 U3.2
NetJ8_SIG: J8.SIG J9.SIG | length 3113.8
  Top Layer w9.46: J8.SIG@3144,49.95 J9.SIG
  Top Layer w15.56: J8.SIG@3144,49.95 ccw(c3145.45,49.95) J8.SIG
VDD: C1.1 C2.1 C6.1 C7.1 C12.1 C13.1 C14.1 C15.1 F1.2 L2.1 L4.1 | length 2481.8
  Top Layer w10: F1.2@435.69,950.44 C14.1 C15.1 C6.1 C7.1@1290.98,950.44 ; C15.1@583.23,941.65 C12.1 C13.1 ; C7.1 L4.1@1356.72,950.44 ; v1(1360.47,991.51) 1360.47,953.75 L4.1 ; v1(2169.78,1027) 2169.78,1025.92 2171.78,1023.92 2171.78,991 2175.72,991 2215.72,951 2274.44,951 C2.1 C1.1
  Top Layer w15.56: F1.2 F1.2@435.69,950.44
  Bottom Layer w10: v1(1360.47,991.51) 1360.72,991.75 2058.75,991.75 2059,992 2131,992 v1@2166,1027
pads on no net: J10.2 J10.3 J10.4 J10.S U1.11 U1.12 U2.10 U2.19 U3.11 U3.12

## Polygon pours and split planes (outlines as drawn)
GND on Bottom Layer "GND_PLANE_BOTTOM" (solid, pour order 22): 0,3213.31 0,0 3530,0 3530,3213.31
GND on Top Layer "GND_PLANE_TOP" (solid, pour order 20): 0,3213.31 0,0 3530,0 3530,3213.31
GND on Layer 1 "GND_PLANE_L1" (solid, pour order 23): 0,3213.31 0,0 3530,0 3530,3213.31

## Other copper
Top Layer:
  pour cut-out: 3437.56,-34.72
  pour cut-out: 3437.56,-34.72

## Silkscreen, mask and mechanical layers (free items; w line width, h text height)
Top Overlay:
  drawing of 588 lines, arcs and shapes, not listed
  text "IFout2" at 2130,2910 h40
  text "IFout1" at 1050,2900 h40
  text "IF1" at 540,2070 h40
  text "IF2" at 2870,2070 h40
  text "USB PWR" at 67,1593 h40
  text "RF" at 1180,290 h40
  text "LO" at 1910,280 h40
Top Solder:
  lines w9.46: 898.2,1184.01 ccw(c996.58,1185.75) 998.32,1087.37 1334.81,1087.37 ; 898.19,1185.75 898.19,1284.17 898.19,1382.6 cw(c996.61,1382.6) 996.61,1481.02 1335.44,1481.02 ; 900,2080 1342.76,2080 ; 1390.31,50 1390.31,560 1390.31,676.1 ; 1390.31,1088.24 1390.31,1256.61 ; 1390.31,1311.73 1390.31,1481.76 ; 1390.44,1481.88 cw(c1687.45,1482.83) 1686.5,1779.84 ; 1391.27,790.83 1391.27,949.05 ; 1391.39,950.83 1391.39,1087.17 ; 1397.87,2080 1479.44,2080 ; 1479,2134.47 1479,2432 ; 1479.72,2079.72 cw(c1481.99,1836.24) 1725.47,1838.5 ; 1480,2747.91 1480,3161.5 ; 1764.84,1838.5 cw(c2003.17,1840.67) 2001,2079 ; 2000,2747.91 2000,3161.5 ; 2001,2079.44 2132.2,2079.44 ; 2001.42,2134.98 2001.42,2433.5 ; 2134,1327.56 2134,1478.56 ; 2136.44,1087 2136.44,1270 ; 2137.22,991 2137.22,1086.22 ; 2137.96,790.27 2137.96,990.26 ; 2138.35,48.5 2138.35,555.83 2138.35,676.1 ; 2187.87,2080 2600,2080 ; 2191.56,1087 2542.44,1087 ; 2191.56,1481 2532.07,1481 ; 2532.51,1480.56 cw(c2532.51,1382.6) 2630.47,1382.6 2630.47,1284.17 2630.47,1174.28 ; 2542.76,1087.33 ccw(c2543.52,1174.28) 2630.46,1172.56 ; 3144,49.95 3144,3161.5
  lines w10: 1823.5,1779.84 cw(c1829.33,1473.95) 2135.22,1479.78
Board Outline:
  the board outline again, w10